# Altium PCB PAPI_M3_RF.PcbDoc
Units mm, origin at the board's own origin, x right, y up, seen from the top; angles counter-clockwise.
Board outline 100 x 60 mm, 2 copper layers (Top Layer, Bottom Layer); 35 components, 35 nets, 244 pads, 170 vias.
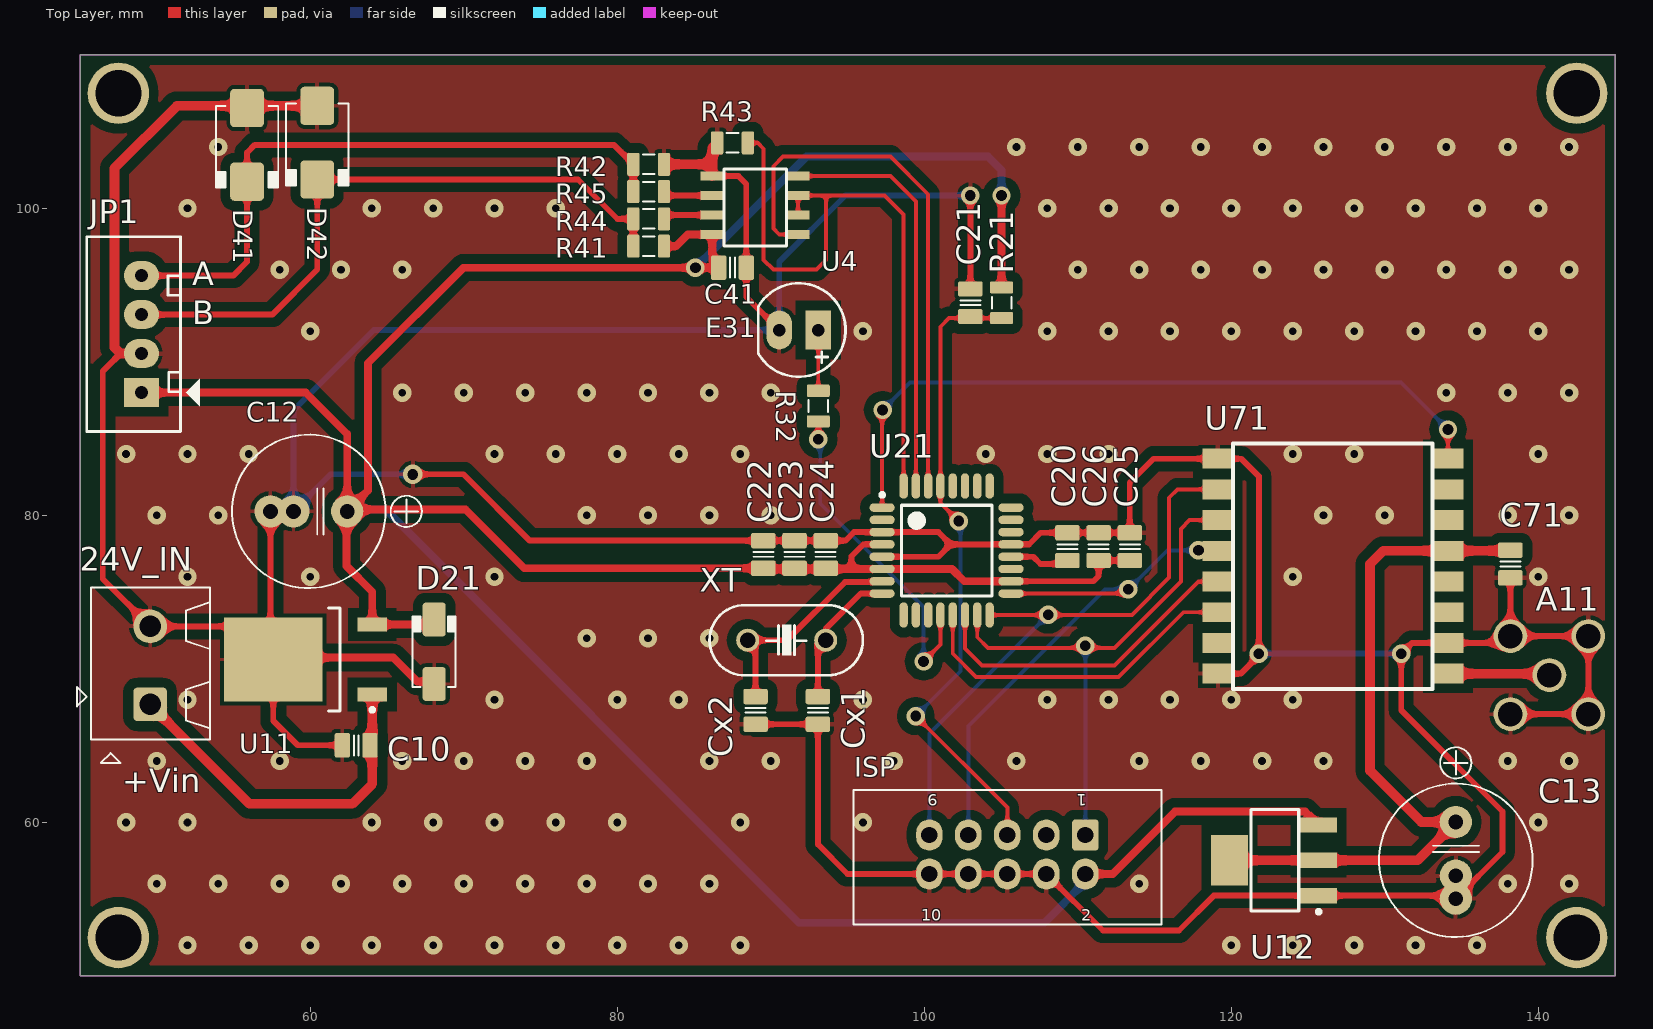
[diagram p0: Top Layer view]
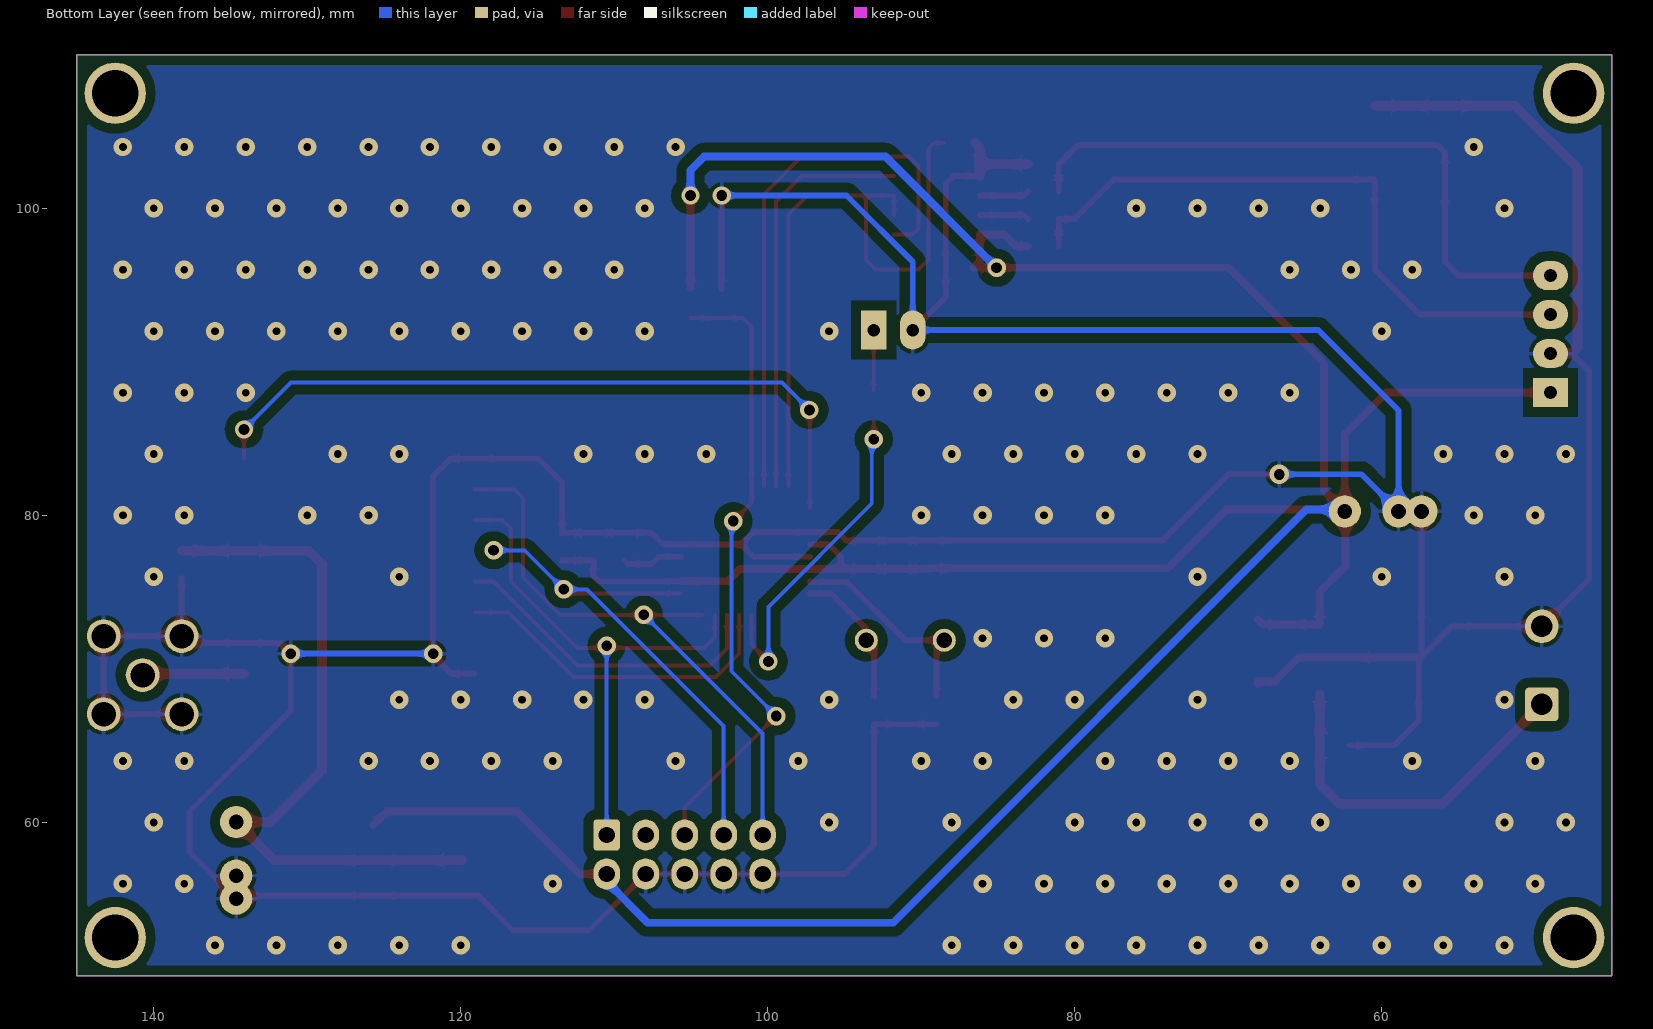
[diagram p1: Bottom Layer view, seen from below]
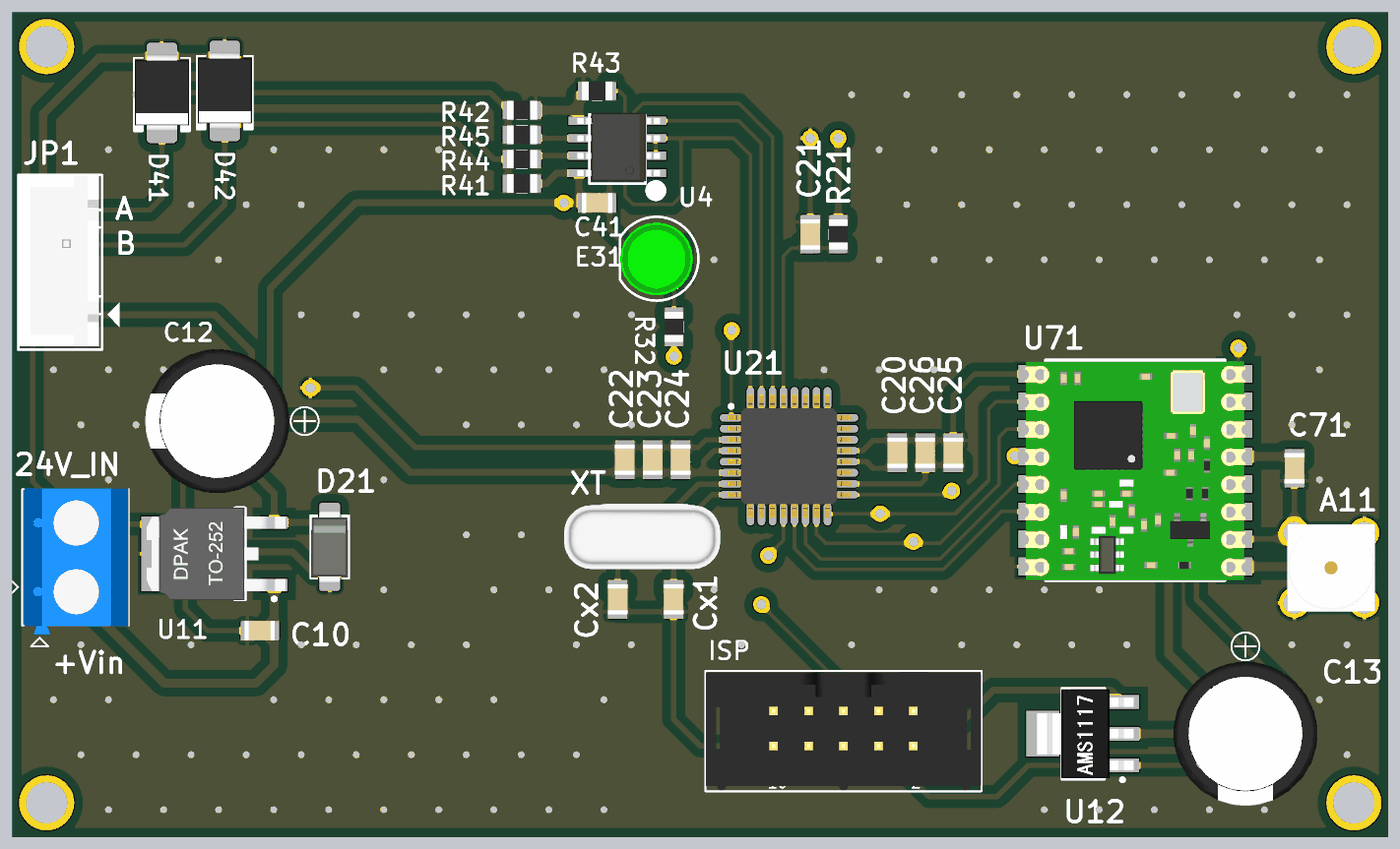
[diagram p2: 3D render of the assembled board from above, using the file's embedded part models]

## Layer stack, top to bottom
Top Solder: solder mask 0.0102, Solder Resist, Dk 3.5
Top Layer: signal copper 0.0356
Dielectric 1: dielectric 0.32, FR-4, Dk 4.8
Bottom Layer: signal copper 0.0356
Bottom Solder: solder mask 0.0102, Solder Resist, Dk 3.5

## Board outline
45,50 145,50 145,110 45,110

## Design rules (kind name [scope] priority, off if disabled: settings)
Clearance [All] p1: gap=0.203 ignorepadtopadclearanceinfootprint=FALSE except(0: Arc-Hole Track-Hole SMDPad-Hole THPad-Hole Via-Hole Fill-Hole Poly-Hole Region-Hole Text-Hole; 0.635: Arc-Poly Track-Poly SMDPad-Poly THPad-Poly Via-Poly Fill-Poly Poly-Poly)
PolygonConnect [All] p1: connectstyle=Relief reliefconductorwidth=0.254 reliefentries=4 polygonreliefangle="90 Angle" airgapwidth=0.254
RoutingVias [All] p1: holewidth=0.711 width=1.27 viastyle="Through Hole" minholewidth=0.7 minwidth=1.2 maxholewidth=0.711 maxwidth=5
SolderMaskExpansion [All] p1: expansion=0.102
Width [All] p1: maxlimit=2.54 minlimit=0.254 preferedwidth=0.254
30 further rules are at their usual default settings.

## Components (designator, comment, footprint, x,y, rotation, side; value= is the part's Value field where it differs from the comment)
24V_IN "VIN" 2P_PCB1 45.72,66.294 r0 top value="2 position"
A11 "Giắc anten SMA" SMA 140.716,69.596 r180 top
C10 "Cap_104_0603" CAPC2012N_F 62.992,65.024 r0 top value=104
C12 "Cap" CAPE3.5-5.0MM_Rad_10x14mm 59.904,80.264 r180 top value=35V/220uF
C13 "Cap" CAPE3.5-5.0MM_Rad_10x14mm 134.62,57.531 r270 top value=35V/220uF
C20 "Tụ điện dán 0603104" CAPC2012N_F 109.324,77.964 r270 top value=104
C21 "Tụ điện dán 0603104" CAPC2012N_F 102.997,93.853 r270 top value=104
C22 "Tụ điện dán 0805104" CAPC2012N_F 89.512,77.456 r270 top value=104
C23 "Tụ điện dán 0805104" CAPC2012N_F 91.544,77.456 r270 top value=104
C24 "Tụ điện dán 0805105" CAPC2012N_F 93.576,77.456 r270 top value=105
C25 "Tụ điện dán 0805103" CAPC2012N_F 113.388,77.964 r270 top value=103
C26 "Tụ điện dán 0805103" CAPC2012N_F 111.356,77.964 r270 top value=103
C41 "Cap_104_0603" CAPC2012N_F 87.503,96.139 r0 top value=104
C71 "Cap_10uF_0805" CAPC2012N_F 138.176,76.835 r90 top value=10uF
Cx1 "Tụ điện dán 060322" CAPC2012N_F 93.068,67.296 r270 top value=22
Cx2 "Tụ điện dán 060322" CAPC2012N_F 89.004,67.296 r270 top value=22
D21 "TVS Diodes" DO-214AC 68.072,71.12 r90 top
D41 "TVS12V" DO-214AA 55.88,104.14 r270 top
D42 "TVS12V" DO-214AA 60.452,104.28 r270 top
E31 "Led" "LED 5mm Green" 91.821,92.075 r180 top
ISP "Giắc đôi 5x2 chân 2.54mm" 10P_PCB_HEADER_BRD_MNT 105.41,57.912 r270 top value="Double-row, 10 positions"
JP1 "JP4" CON4 49,88 r90 top value="Connector 4"
R21 "Điện trở dán 060310k" RESC2012N_F 105.029,93.853 r90 top value=10k
R32 "Điện trở dán 0603330R" RESC2012N_F 93.091,87.122 r90 top value=330R
R41 "Res_1k_0603" RESC2012N_F 82.042,97.536 r0 top value=1k
R42 "Res_1k_0603" RESC2012N_F 82.042,102.87 r180 top value=1k
R43 "Res_10k_0603" RESC2012N_F 87.503,104.267 r0 top value=10k
R44 "Res_10R_0805" RESC2012N_F 82.042,99.314 r180 top value=10R
R45 "Res_10R_0805" RESC2012N_F 82.042,101.092 r180 top value=10R
U4 "MAX485" "SOIC 8" 91.77,97.028 r180 top
U11 "78M05" "TO252 D-PAK" 59.69,70.612 r180 top
U12 "AS1117" SOT223-4N 127.081,53.924 r90 top
U21 "ATmega328PA" TQFP32 101.45,77.71 r0 top
U71 "RFM9xW" RFM9xW 119.112,68.692 r0 top
XT "16MHz" XT2 91.036,71.868 r0 top

## Footprints (in the part's own frame and the unit in brackets; to place one, negate y for a bottom-side part, rotate by r counter-clockwise, add the part's x,y. Pads: shape width x height; smd on the part's side, far side on the other; paste and mask are expansions set on the pad)
2P_PCB1 [mm]
  rrect25% 2.2x2.2 hole 1.4: 1(3.85,1.397)
  round 2.2 hole 1.4: 2(3.85,6.477)
  silkscreen extent -0.93,-2.41 7.75,9.02, body extent 0.14,-1.54 7.74,9.06, height 10.01
10P_PCB_HEADER_BRD_MNT [mil] "HEADER BRD MNT 10POS 2.54MM"
  round 40 on Mech14: 0(0,0)
  rrect25% 80x68 hole 42: 1(-50,200)
  oval 80x68 hole 42: 2(50,200) 3(-50,100) 4(50,100) 5(-50,0) 6(50,0) 7(-50,-100) 8(50,-100) 9(-50,-200) 10(50,-200)
  silkscreen extent -165,-395 180,395, body extent -162,-394 178,394, height 390
CAPC2012N_F [mm] "Chip Capacitor, Body 2.0x1.2mm, 0805, IPC Medium Density, for Flex circuits"
  round 0.254 on Mech14: 0(0,0)
  rrect25% 1.2x1.4 on Top Solder: 1(-0.9,0) 1(0.9,0)
  rrect25% 1x1.6 smd paste-1: 1(-0.9,0) 2(0.9,0)
  rrect25% 1x1.4 on Top Paste: 1(-0.9,0) 1(0.9,0)
  Top Layer pour cut-out: -0.4,0.8 0.4,0.8 0.4,-0.8 -0.4,-0.8
  silkscreen extent -0.15,-0.65 0.15,0.65, body extent -1.1,-0.72 1.1,0.73, height 1.34
CAPE3.5-5.0MM_Rad_10x14mm [mm] "3.5 & 5.0mm Pitch Radial Capacitor 10x14mm DxH"
  round 0.5 on Mech14: 0(0,0)
  round 2.1 hole 0.965: 1(-2.5,0) 2(1,0) 2(2.5,0)
  silkscreen extent -7.37,-5 5,5, body extent -5.25,-5.24 5.21,5.24, height 13.99
CON4 [mil] "CON4"
  rect 75x90 hole 34: 1(0,0)
  oval 75x90 hole 34: 2(100,0) 3(200,0) 4(300,0)
  silkscreen extent -100,-149 400,140, body extent -90,-90 398,136, height 276
DO-214AA [mm] "JEDEC DO214 variation AA. SMB"
  round 0.508 on Mech14: 0(0,0)
  rrect25% 2.5x2.2 smd: A(-2.4,0) K(2.4,0)
  silkscreen extent -2.54,-2.03 2.79,2.03, body extent -2.8,-1.97 2.8,1.98, height 2.62
DO-214AC [mm] "JEDEC DO214 variation AC. SMA"
  round 0.508 on Mech14: 0(0,0)
  rrect25% 2.2x1.5 smd: A(-2.1,0) K(2.1,0)
  silkscreen extent -2.3,-1.4 2.3,1.4, body extent -2.6,-1.3 2.6,1.3, height 2.42
"LED 5mm Green" [mil]
  rect 65x100 hole 32: 1(-50,0)
  oval 65x100 hole 32: 2(50,0)
  silkscreen extent -120,-120 104,120, body extent -104,-104 104,105, height 387
RESC2012N_F [mm] "Chip Resistor, Body 2.0x1.2mm, 0805, IPC Medium Density"
  round 0.254 on Mech14: 0(0,0)
  rrect25% 1x1.3 on Top Solder: 1(-1,0) 1(1,0)
  rrect25% 0.8x1.5 smd paste-1: 1(-1,0) 2(1,0)
  rrect25% 0.8x1.3 on Top Paste: 1(-1,0) 1(1,0)
  Top Layer pour cut-out: -0.6,0.75 0.6,0.75 0.6,-0.75 -0.6,-0.75
  silkscreen extent -0.38,-0.64 0.38,0.64, body extent -1.1,-0.67 1.1,0.68, height 0.69
RFM9xW [mm] "HopeRF"
  rect 2x1.3 smd: 1(0,15) 2(0,13) 3(0,11) 4(0,9) 5(0,7) 6(0,5) 7(0,3) 8(0,1) 9(15,15) 10(15,13) 11(15,11) 12(15,9) 13(15,7) 14(15,5) 15(15,3) 16(15,1)
  silkscreen extent 1,0 14,16, body extent -0.5,0 15.5,15.9, height 2.23
SMA [mm]
  round 2.2 hole 1.6: 1(0,0) 2(-2.54,2.54) 3(2.54,2.54) 4(2.54,-2.54) 5(-2.54,-2.54)
  body extent -3.3,-3.18 3.05,3.18, height 9.54
"SOIC 8" [mm]
  round 1.524 on Top Overlay: 1(0,0)
  rect 1.52x0.6 smd: 1(0,-1.27) 2(0,-2.54) 3(0,-3.81) 4(0,-5.08) 5(5.588,-5.08) 6(5.588,-3.81) 7(5.588,-2.54) 8(5.588,-1.27)
  silkscreen extent 0.76,-5.55 4.83,-0.51, body extent -0.31,-5.67 5.71,-0.67, height 1.75
SOT223-4N [mm]
  rect 1x2.4 smd: 1(1.307,1.393) 2(3.607,1.393) 3(5.907,1.393)
  rect 3.3x2.4 smd: 4(3.607,7.193)
  silkscreen extent 0.13,1.27 6.91,5.79, body extent 0.36,0.6 6.86,7.59, height 1.87
"TO252 D-PAK" [mm]
  rect 1.9x0.9 smd: 1(-4.35,2.28) 3(-4.35,-2.28)
  rect 6.4x5.45 smd: 2(2.1,0)
  silkscreen extent -4.47,-3.35 -1.5,3.4, body extent -5.18,-3.37 4.92,3.37, height 2.38
TQFP32 [mm] "32-TQFP (7x7)"
  oval 1.65x0.55 smd: 1(-4.2,2.8) 2(-4.2,2) 3(-4.2,1.2) 4(-4.2,0.4) 5(-4.2,-0.4) 6(-4.2,-1.2) 7(-4.2,-2) 8(-4.2,-2.8) 17(4.2,-2.8) 18(4.2,-2) 19(4.2,-1.2) 20(4.2,-0.4) 21(4.2,0.4) 22(4.2,1.2) 23(4.2,2) 24(4.2,2.8)
  oval 0.55x1.65 smd: 9(-2.8,-4.2) 10(-2,-4.2) 11(-1.2,-4.2) 12(-0.4,-4.2) 13(0.4,-4.2) 14(1.2,-4.2) 15(2,-4.2) 16(2.8,-4.2) 25(2.8,4.2) 26(2,4.2) 27(1.2,4.2) 28(0.4,4.2) 29(-0.4,4.2) 30(-1.2,4.2) 31(-2,4.2) 32(-2.8,4.2)
  silkscreen extent -4.32,-2.95 2.95,3.75, body extent -4.5,-4.5 4.5,4.5, height 1.6
XT2 [mm]
  round 1.5 hole 1: 1(-2.54,0) 2(2.54,0)
  silkscreen extent -5.03,-2.29 4.96,2.29, body extent -5.93,-2.36 5.42,2.29, height 3.5

## Part data
24V_IN: library part 2P_ScrewTerm_90S_3.81MM, "Terminal Block Screw Type THT 2-Position 3.81mm pitch", Color=Black, Manufacturer 1="Tyco Electronics", Manufacturer Part Number 1=1776113-2, Package / Case="Side Entry; 3.81mm pitch", Supplier Part Number 1=A97976-ND, Category="Connectors Interconnects", Pitch="0.150\" (3.81mm)", Positions Per Level=2, Supplier 1=Digi-Key
A11: library part RF_SMA
C10 C41 C71: library part "CAP NP"
C20 C21 C22 C23 C24 C25 C26 Cx1 Cx2: library part "CAP NP", "Capacitor non polarized", cm1="T? di?n dán 0603", cm2="T? di?n dán 0805", cm3="T? di?n dán 1206"
D21: "TVS Diodes - Transient Voltage Suppressors", SMAJ5.0A="TVS Diodes - Transient Voltage Suppressors 5volts 400watts UniDirectional", SMBJ12CA-E3/52=12V,600W,DO-214AA
D41 D42: library part Tranzorb, "Transient Voltage Suppression (TVS) Diode", LatestRevisionDate=17-Jul-2002, LatestRevisionNote="Re-released for DXP Platform.", PackageDescription="Axial Lead Diode", PackageReference=DO-7, Published=24-Mar-1999, Publisher="Altium Limited"
ISP: library part CONN_HEADER_2x5P_0.100in_Male, "Header THD 10 POS Double-row 2.54mm pitch", Manufacturer 1=3M, Manufacturer Part Number 1=D2510-6002-AR, Package / Case="Connector header; 2.54mm pitch", Supplier Part Number 1=MHC10E-ND, ComponentLink1Description=http://multimedia.3m.com/mws/mediawebserver?66666UuZjcFSLXTtm8T_oxMcEVuQEcuZgVs6EVs6E666666--, ComponentLink1URL=http://multimedia.3m.com/mws/mediawebserver?66666UuZjcFSLXTtm8T_oxMcEVuQEcuZgVs6EVs6E666666--, Connector Type="Header, Shrouded", Contact Mating Length="0.243\" (6.17mm)", Contact Type="Male Pin", Number of Positions=10, Number of Rows=2, Pitch="0.100\" (2.54mm)", QtyOverride=1, Row Spacing="0.100\" (2.54mm)", Supplier 1=Digi-Key
JP1: library part Con4, "Connector 4"
R21 R32: library part Res, "Resistor", cm1="Ði?n tr? dán 0603", cm2="Ði?n tr? c?m 1/4W", cm3="Ði?n tr? dán 0805", cm4="Ði?n tr? dán 1206"
R41 R42 R43 R44 R45: library part Res
U4: "RS232 - RS485 (Same sn75176)"
U11: library part LM78xx
U21: library part ATmega48/168/328, "ATmega48/168/328"
XT: library part Crystal

## Free pads (board coordinates)
  round 4 hole 3: A(47.5,52.5) A(47.5,107.5) A(142.5,52.5) A(142.5,107.5)

## Via types
v1: diameter 1.2, hole 0.5, Top Layer to Bottom Layer, tented both sides, 154 vias
v2: diameter 1.2, hole 0.7, Top Layer to Bottom Layer, 15 vias
v3: diameter 1.27, hole 0.711, Top Layer to Bottom Layer, 1 vias

## Nets (pads, with @x,y where several pads share a name; then routed paths per layer and width w, separated by ;. In a path a pad name is that pad's centre, name@x,y a point inside that pad or via, vN(x,y) a via of type N, cw(c..) or ccw(c..) an arc to the next point about the centre after c; other vN are vias at no path point)
+5V: C12.1 C22.2 C23.2 C24.2 C25.2 C26.2 C41.1@86.603,96.139 D21.K ISP.2 JP1.1 R21.2 R41.2 U4.8 U11.3 U12.3 U21.4 U21.6 U21.18 | length 239.4
  Top Layer w0.381: 95.25,76.51 95.25,77.343 96.017,78.11 U21.4 ; U21.18 111.016,75.71 111.356,76.05 C26.2 C25.2
  Top Layer w0.508: JP1.1 59.701,88 62.404,85.297 C12.1 ; D21.K 67.744,72.892 U11.3 64.04,75.025 62.357,76.708 62.357,80.217 C12.1 ; R41.2 83.82,97.536 84.582,98.298 U4.8 86.182,96.56 86.603,96.139 v2(85.09,96.139) 69.977,96.139 63.754,89.916 63.754,81.614 C12.1@62.531,80.391 ; R21.2 v2(105.029,100.838) ; U21.18 102.598,75.71 101.798,76.51 U21.6 95.25,76.51 89.558,76.51 C22.2 73.939,76.556 70.104,80.391 C12.1@62.531,80.391 ; ISP.2 112.268,56.642 116.332,60.706 124.813,60.706 U12.3 ; C12.1 C12.1@62.531,80.391
  Bottom Layer w0.508: C12.1 62.531,80.391 64.897,80.391 91.821,53.467 107.823,53.467 110.49,56.134 ISP.2 ; v2(85.09,96.139) 92.329,103.378 104.14,103.378 105.029,102.489 v2(105.029,100.838)
+24V: 24V_IN.1 C10.2 U11.1 | length 23.5
  Top Layer w0.635: 24V_IN.1 56.047,61.214 62.738,61.214 64.04,62.516 U11.1
AREF: C20.2 U21.20 | length 4
  Top Layer w0.381: U21.20 107.094,77.31 107.569,76.835 109.095,76.835 C20.2
DIO2: U21.1 U71.9 | length 47.1
  Top Layer w0.254: U21.1 97.25,86.836 v2(97.282,86.868) ; U71.9 v2(134.112,85.598)
  Bottom Layer w0.254: v2(97.282,86.868) 99.06,88.646 131.064,88.646 v2(134.112,85.598)
GND: 24V_IN.2 A11.2 A11.3 A11.4 A11.5 C10.1@62.092,65.024 C12.2 C13.2 C20.1@109.324,78.864 C21.1@102.997,94.753 C22.1@89.512,78.356 C23.1@91.544,78.356 C24.1@93.576,78.356 C25.1@113.388,78.864 C26.1@111.356,78.864 C41.2 C71.1@138.176,75.935 Cx1.2 Cx2.2 D21.A D41.A D42.A E31.2 ISP.4 ISP.6 ISP.8 ISP.10 JP1.2 R42.1@83.042,102.87 R43.1@86.503,104.267 U4.5 U11.2 U12.1 U21.3 U21.5 U21.21 U71.1 U71.8 U71.15 | length 373.6
  Top Layer w0.381: 47.636,90.54 46.482,89.386 46.482,75.859 24V_IN.2 55.431,72.771 U11.2@57.404,70.798 ; C12.2@57.404,80.264 U11.2@57.404,70.798 ; C10.1@62.092,65.024 59.182,65.024 57.59,66.616 U11.2 U11.2@57.404,70.798 ; v3(66.675,82.677) 69.977,82.677 74.298,78.356 89.512,78.356 91.544,78.356 93.576,78.356 94.866,78.356 95.42,78.91 U21.3 100.922,78.91 101.722,78.11 ; U4.5 87.884,102.108 88.403,101.589 C41.2 88.403,94.223 E31.2 ; Cx2.2 Cx1.2 93.068,58.57 94.996,56.642 ISP.10 ISP.8 ISP.6 ISP.4 111.633,52.959 116.586,52.959 118.858,55.231 U12.1 134.42,55.231 134.62,55.031 137.668,58.079 137.668,60.706 131.064,67.31 v2(131.064,70.993) 131.763,71.692 U71.15 137.732,71.692 A11.4 ; U21.5 100.922,77.31 101.722,78.11 ; C21.1@102.997,94.753 v2(102.997,100.838) ; C25.1@113.388,78.864 C25.1@113.385,78.867 ; U71.8 120.619,69.692 121.793,70.866 v2(121.793,70.993) 121.793,82.55 120.651,83.692 U71.1 114.934,83.692 113.385,82.143 C25.1@113.385,78.867 ; A11.3 A11.2 A11.5 A11.4 ; C71.1@138.176,75.935 A11.4 ; 101.722,78.11 U21.21 106.812,78.11 107.569,78.867 C25.1@113.385,78.867
  Top Layer w0.508: U11.2 57.717,70.739 65.405,70.739 66.968,69.176 68.072,69.176 D21.A
  Top Layer w0.635: JP1.2 47.636,90.54 47.244,90.932 47.244,102.616 51.308,106.68 D42.A ; R42.1@83.042,102.87 86.182,102.87 ; U4.5 86.182,102.87 ; R43.1@86.503,104.267 86.182,103.946 86.182,102.87
  Bottom Layer w0.381: v3(66.675,82.677) 61.317,82.677 58.904,80.264 58.904,86.844 64.135,92.075 E31.2 90.551,96.52 94.869,100.838 v2(102.997,100.838) ; v2(121.793,70.993) v2(131.064,70.993)
  other v1: 52,52 56,52 60,52 64,52 68,52 72,52 76,52 80,52 84,52 88,52 120,52 124,52 128,52 132,52 136,52 50,56 54,56 58,56 62,56 66,56 70,56 74,56 78,56 82,56 86,56 114,56 138,56 142,56 48,60 52,60 64,60 68,60 72,60 76,60 80,60 88,60 96,60 140,60 50,64 58,64 66,64 70,64 74,64 78,64 86,64 90,64 98,64 106,64 114,64 118,64 122,64 126,64 138,64 142,64 52,68 72,68 80,68 84,68 96,68 108,68 112,68 116,68 120,68 124,68 78,72 82,72 86,72 52,76 60,76 72,76 124,76 140,76 50,80 54,80 78,80 82,80 86,80 90,80 126,80 130,80 138,80 142,80 48,84 52,84 56,84 72,84 76,84 80,84 84,84 88,84 104,84 108,84 112,84 124,84 128,84 140,84 66,88 70,88 74,88 78,88 82,88 86,88 90,88 134,88 138,88 142,88 60,92 96,92 108,92 112,92 116,92 120,92 124,92 128,92 132,92 136,92 140,92 58,96 62,96 66,96 110,96 114,96 118,96 122,96 126,96 130,96 134,96 138,96 142,96 52,100 64,100 68,100 72,100 76,100 108,100 112,100 116,100 120,100 124,100 128,100 132,100 136,100 140,100 54,104 106,104 110,104 114,104 118,104 122,104 126,104 130,104 134,104 138,104 142,104
LED: R32.1@93.091,86.122 U21.12 | length 21.9
  Top Layer w0.254: v2(93.091,84.963) R32.1@93.091,86.122 ; v2(99.949,70.485) 101.05,71.586 U21.12
  Bottom Layer w0.254: v2@93.218,84.963 93.218,80.772 99.949,74.041 v2(99.949,70.485)
MCU_RX: U4.1@91.77,98.298 U21.30 | length 36.2
  Top Layer w0.254: U4.1@91.77,98.298 90.551,98.298 90.17,98.679 90.17,102.743 90.805,103.378 97.79,103.378 100.25,100.918 U21.30
MCU_TX: U4.4 U21.31 | length 26.9
  Top Layer w0.254: U4.4 97.79,102.108 99.45,100.448 U21.31
MISO: ISP.9 U21.16 U71.2 | length 38.9
  Top Layer w0.254: U21.16 113.515,73.51 115.951,75.946 115.951,81.153 116.49,81.692 U71.2
  Bottom Layer w0.254: ISP.9 100.33,65.786 v2(108.077,73.533)
MOSI: ISP.1 U21.15 U71.3 | length 35.2
  Top Layer w0.254: U21.15 103.45,72.064 104.14,71.374 112.395,71.374 116.713,75.692 116.713,79.121 117.284,79.692 U71.3
  Bottom Layer w0.254: ISP.1 v2(110.49,71.501)
NetE31_1: E31.1 R32.2 | length 4
  Top Layer w0.254: R32.2 E31.1
NetR44_1: R44.1@83.042,99.314 U4.7 | length 3.2
  Top Layer w0.381: R44.1@83.042,99.314 83.296,99.568 U4.7
NetR45_1: R45.1@83.042,101.092 U4.6 | length 3.2
  Top Layer w0.381: R45.1@83.042,101.092 83.296,100.838 U4.6
NetU21_19: U21.19
NetU21_23: U21.23
NetU21_24: U21.24
NetU21_25: U21.25
NetU21_26: U21.26
NetU21_27: U21.27
NetU21_28: U21.28
PD4: U21.2
PD5: U21.9
PD6: U21.10
PD7: U21.11
RD485: R43.2 U4.2 U4.3 U21.32 | length 43.6
  Top Layer w0.254: R43.2 89.154,104.267 89.535,103.886 89.535,96.647 90.17,96.012 92.964,96.012 93.599,96.647 93.599,100.838 ; U4.2 U4.3 93.599,100.838 ; U21.32 98.65,99.597 97.409,100.838 93.599,100.838
RF_ANT: A11.1 U71.16 | length 6.6
  Top Layer w0.635: U71.16 140.62,69.692 A11.1
RF_NSS: U21.14 U71.5 | length 21.4
  Top Layer w0.254: U21.14 102.65,71.34 103.759,70.231 112.395,70.231 117.856,75.692 U71.5
RF_RESET: U21.13 U71.6 | length 22.2
  Top Layer w0.254: U21.13 101.85,70.997 103.378,69.469 112.649,69.469 116.872,73.692 U71.6
RF_SCK: ISP.7 U21.17 U71.4 | length 34.6
  Top Layer w0.254: U21.17 113.01,74.91 v2(113.284,75.184)
  Bottom Layer w0.254: ISP.7 102.87,66.294 111.76,75.184 v2(113.284,75.184) 115.824,77.724 v2(117.856,77.724)
RS485A: D41.K JP1.4 R42.2 R45.2 | length 42
  Top Layer w0.381: JP1.4 54.98,95.62 55.88,96.52 D41.K 55.88,103.632 56.388,104.14 79.772,104.14 R42.2 R45.2
RS485B: D42.K JP1.3 R41.1@81.042,97.536 R44.2 | length 42
  Top Layer w0.381: JP1.3 57.52,93.08 60.452,96.012 D42.K 77.444,101.88 80.01,99.314 R44.2 R41.1@81.042,97.536
RST: C21.2 ISP.5 R21.1@105.029,92.853 U21.29 | length 41.5
  Top Layer w0.254: v2(99.441,66.929) 105.41,60.96 ISP.5 ; v2(102.235,79.629) 101.05,80.814 U21.29 101.05,92.287 101.616,92.853 R21.1@105.029,92.853
  Bottom Layer w0.254: v2(99.441,66.929) 102.362,69.85 102.362,79.502 v2(102.235,79.629)
VCC: C13.1 C71.2 U12.2 U12.4 U71.12 | length 45.7
  Top Layer w0.635: U12.4 U12.2 132.12,57.531 C13.1 132.374,60.031 129.032,63.373 129.032,76.835 129.889,77.692 U71.12 138.133,77.692 C71.2
XTAL1: Cx2.1@89.004,68.196 U21.7 XT.1 | length 14.3
  Top Layer w0.381: Cx2.1@89.004,68.196 89.004,71.36 XT.1 91.045,71.868 94.839,75.662 97.25,75.662 U21.7
XTAL2: Cx1.1@93.068,68.196 U21.8 XT.2 | length 9.3
  Top Layer w0.381: Cx1.1@93.068,68.196 93.068,71.36 XT.2 93.576,72.621 95.865,74.91 U21.8
pads on no net: C10.0 C10.1@62.092,65.024 C10.1@63.892,65.024 C12.0 C13.0 C20.0 C20.1@109.324,77.064 C20.1@109.324,78.864 C21.0 C21.1@102.997,92.953 C21.1@102.997,94.753 C22.0 C22.1@89.512,76.556 C22.1@89.512,78.356 C23.0 C23.1@91.544,76.556 C23.1@91.544,78.356 C24.0 C24.1@93.576,76.556 C24.1@93.576,78.356 C25.0 C25.1@113.388,77.064 C25.1@113.388,78.864 C26.0 C26.1@111.356,77.064 C26.1@111.356,78.864 C41.0 C41.1@86.603,96.139 C41.1@88.403,96.139 C71.0 C71.1@138.176,75.935 C71.1@138.176,77.735 Cx1.0 Cx1.1@93.068,66.396 Cx1.1@93.068,68.196 Cx2.0 Cx2.1@89.004,66.396 Cx2.1@89.004,68.196 D21.0 D41.0 D42.0 ISP.0 ISP.3 R21.0 R21.1@105.029,92.853 R21.1@105.029,94.853 R32.0 R32.1@93.091,86.122 R32.1@93.091,88.122 R41.0 R41.1@81.042,97.536 R41.1@83.042,97.536 R42.0 R42.1@81.042,102.87 R42.1@83.042,102.87 R43.0 R43.1@86.503,104.267 R43.1@88.503,104.267 R44.0 R44.1@81.042,99.314 R44.1@83.042,99.314 R45.0 R45.1@81.042,101.092 R45.1@83.042,101.092 U4.1@91.77,97.028 U21.22 U71.7 U71.10 U71.11 U71.13 U71.14

## Polygon pours and split planes (outlines as drawn)
GND on Bottom Layer "Top Layer-No Net" (solid, pour order 0): 45,50 145,50 145,110 45,110
GND on Top Layer "Top Layer-No Net" (solid, pour order 2): 45,50 145,50 145,110 45,110

## Keep-outs
Keep-Out Layer:
  the board outline again, w0.1

## Silkscreen, mask and mechanical layers (free items; w line width, h text height)
Top Overlay:
  text "A" at 52.324,94.996 h1.52
  text "B" at 52.324,92.456 h1.52
  text "+Vin" at 47.752,61.976 h1.52

## Dimensions
47.5,107.5 to 47.5,52.5 on Bottom Overlay
142.5,107.5 to 47.5,107.5 on Bottom Overlay
44.696,107.5 to 145,110 on Bottom Overlay
45,110 to 45,50 on Bottom Overlay

## Text inside footprints (layer, text, board x,y; h text height)
ISP: Top Overlay "9" at 100.863,61.849 h0.76 r180; Top Overlay "10" at 99.815,53.594 h0.76; Top Overlay "1" at 110.581,61.849 h0.76 r180; Top Overlay "2" at 110.236,53.594 h0.76